# Altium PCB ALU_Add_Shift.PcbDoc
Units mil, origin at the board's own origin, x right, y up, seen from the top; angles counter-clockwise.
Board outline 5200 x 2700 mil, 2 copper layers (Top Layer, Bottom Layer), stack 61.756 mil thick; 43 components, 102 nets, 335 pads, 125 vias.
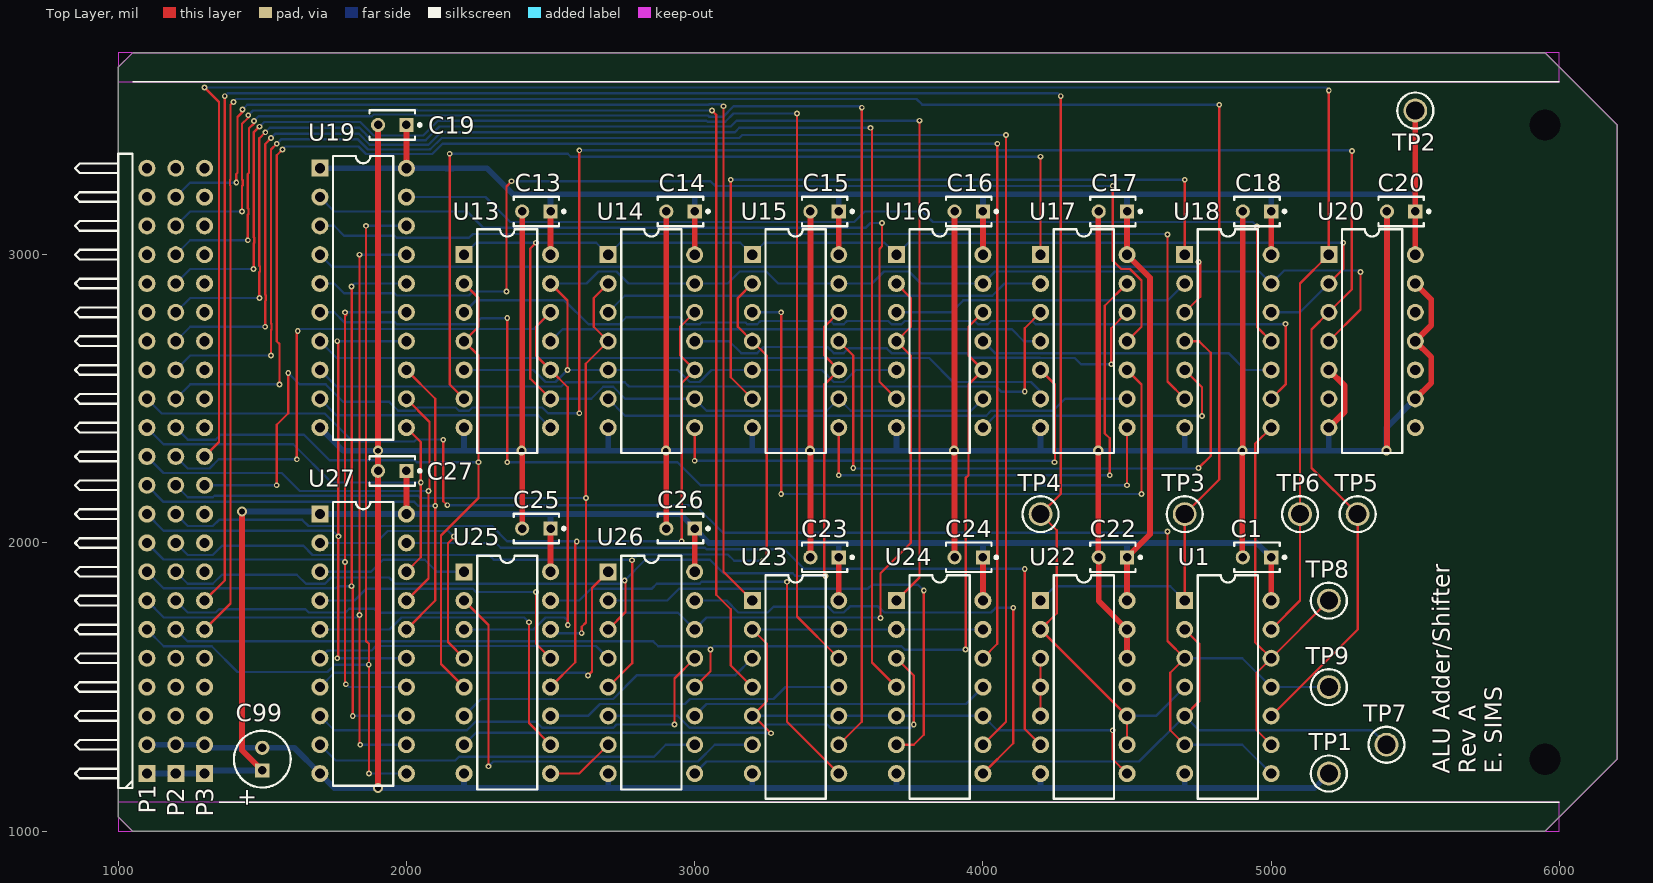
[diagram p0: Top Layer view]
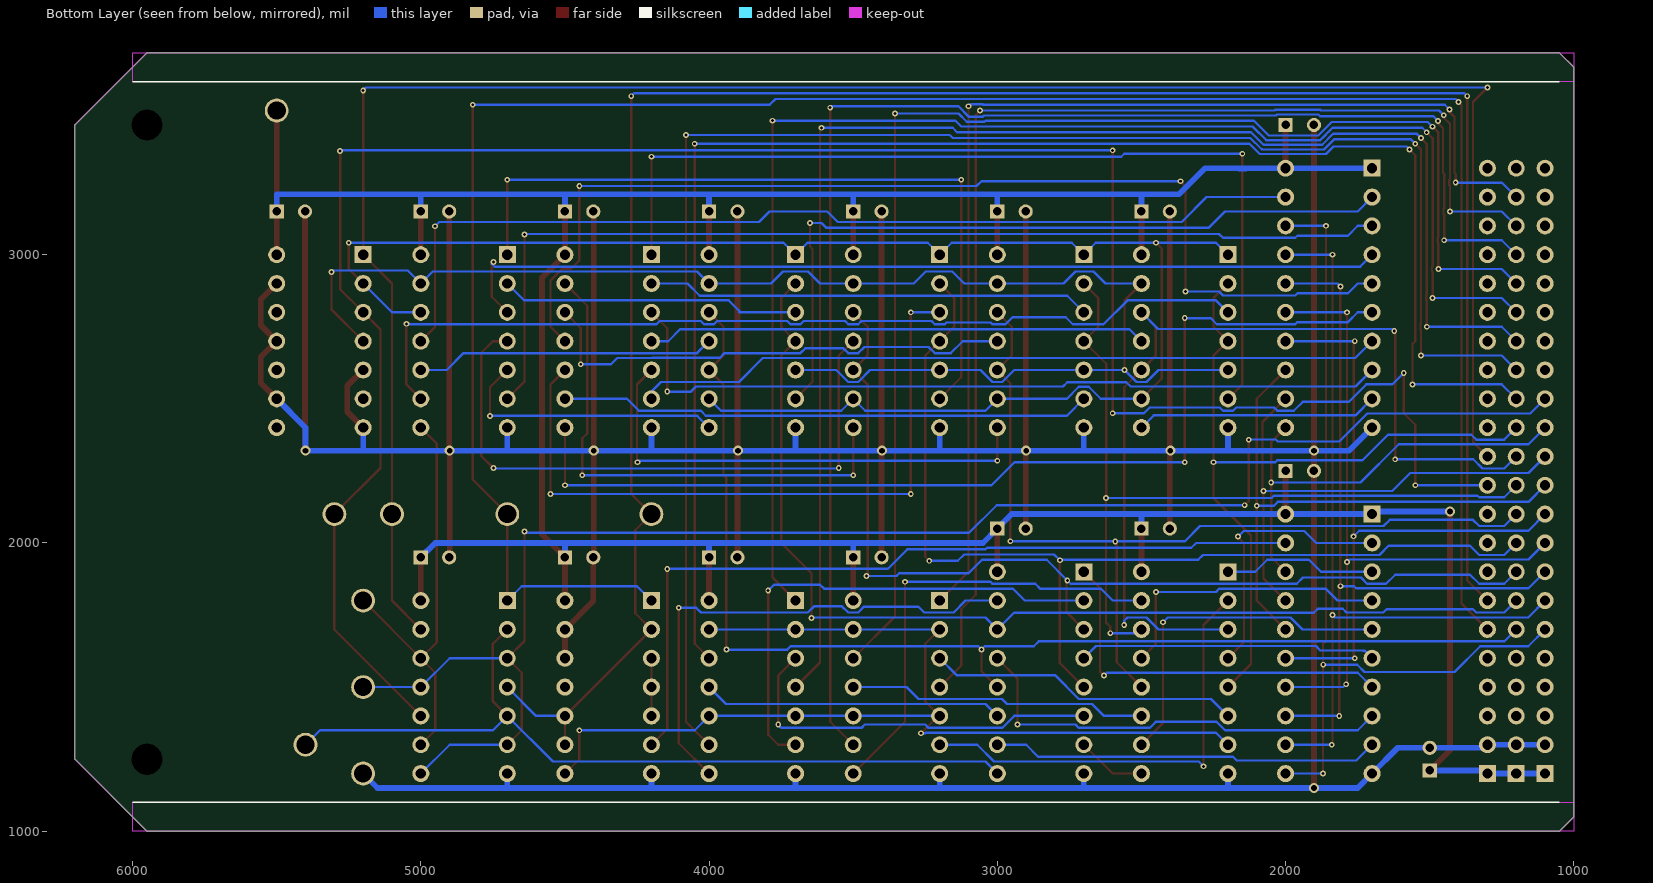
[diagram p1: Bottom Layer view, seen from below]

## Layer stack, top to bottom
Top Solder: solder mask 1, SM-001, Dk 4
Top Layer: signal copper 1.378
Dielectric 1: core 59, Core-043, Dk 4.3
Bottom Layer: signal copper 1.378
Bottom Solder: solder mask 1, SM-001, Dk 4

## Board outline
1000,1050 1050,1000 5950,1000 6200,1250 6200,3450 5950,3700 1050,3700 1000,3650

## Design rules (kind name [scope] priority, off if disabled: settings)
Clearance [All] p1: gap=8 ignorepadtopadclearanceinfootprint=FALSE
HoleSize [All] p1: absolutevalues=TRUE maxlimit=120 minlimit=10 maxpercent=80.000 minpercent=20.000
PolygonConnect [All] p1: connectstyle=Relief reliefconductorwidth=10 reliefentries=4 polygonreliefangle="90 Angle" airgapwidth=10
RoutingVias "Schematic Routing Via Style_1" [InNetClass('PWR')] p1: holewidth=20 width=35 viastyle="Through Hole" minholewidth=20 minwidth=35 maxholewidth=20 maxwidth=50
RoutingVias [All] p2: holewidth=28 width=50 viastyle="Through Hole" minholewidth=10 minwidth=20 maxholewidth=28 maxwidth=50
SilkToSilkClearance [All] p1: silktosilkclearance=5
SolderMaskExpansion [All] p1: expansion=4 istentingtop=FALSE
Width "Schematic Width Constraint_1" [InNetClass('PWR')] p1: maxlimit=50 minlimit=20 preferedwidth=20
Width [All] p2: maxlimit=20 minlimit=8 preferedwidth=8
28 further rules are at their usual default settings.

## Classes and differential pairs
net class PWR: GND VCC
net class Yd[0..7]: Yd0 Yd1 Yd2 Yd3 Yd4 Yd5 Yd6 Yd7
net class ADD[0..7]: ADD0 ADD1 ADD2 ADD3 ADD4 ADD5 ADD6 ADD7
net class SH[0..7]: SH0 SH1 SH2 SH3 SH4 SH5 SH6 SH7
component class SHIFT: C13 C14 C15 C16 C17 C18 C19 C20 U13 U14 U15 U16 U17 U18 U19 U20
component class ADD: C22 C23 C24 C25 C26 C27 U22 U23 U24 U25 U26 U27
net class Y[0..7]: Y0 Y1 Y2 Y3 Y4 Y5 Y6 Y7
net class X[0..7]: X0 X1 X2 X3 X4 X5 X6 X7
component class ALU_Add_Shift: C1 C99 P1 P2 P3 TP1 TP2 TP3 TP4 TP5 TP6 TP7 TP8 TP9 U1
net class BUS[0..7]: BUS0 BUS1 BUS2 BUS3 BUS4 BUS5 BUS6 BUS7

## Components (designator, comment, footprint, x,y, rotation, side; value= is the part's Value field where it differs from the comment)
C1 "K104K15X7RF5TL2" VISH-K104K15X7RF5TL2 4950.79,1950 r180 top locked
C13 "K104K15X7RF5TL2" VISH-K104K15X7RF5TL2 2450.79,3150 r180 top locked
C14 "K104K15X7RF5TL2" VISH-K104K15X7RF5TL2 2950.79,3150 r180 top locked
C15 "K104K15X7RF5TL2" VISH-K104K15X7RF5TL2 3450.79,3150 r180 top locked
C16 "K104K15X7RF5TL2" VISH-K104K15X7RF5TL2 3950.79,3150 r180 top locked
C17 "K104K15X7RF5TL2" VISH-K104K15X7RF5TL2 4450.79,3150 r180 top locked
C18 "K104K15X7RF5TL2" VISH-K104K15X7RF5TL2 4950.79,3150 r180 top locked
C19 "K104K15X7RF5TL2" VISH-K104K15X7RF5TL2 1950.79,3450 r180 top locked
C20 "K104K15X7RF5TL2" VISH-K104K15X7RF5TL2 5450.79,3150 r180 top locked
C22 "K104K15X7RF5TL2" VISH-K104K15X7RF5TL2 4450.79,1950 r180 top locked
C23 "K104K15X7RF5TL2" VISH-K104K15X7RF5TL2 3450.79,1950 r180 top locked
C24 "K104K15X7RF5TL2" VISH-K104K15X7RF5TL2 3950.79,1950 r180 top locked
C25 "K104K15X7RF5TL2" VISH-K104K15X7RF5TL2 2450.79,2050 r180 top locked
C26 "K104K15X7RF5TL2" VISH-K104K15X7RF5TL2 2950.79,2050 r180 top locked
C27 "K104K15X7RF5TL2" VISH-K104K15X7RF5TL2 1950.79,2250 r180 top locked
C99 "Cap Pol5" C5x7 1500,1250 r90 top locked value=10uF
P1 "Header 22H" HDR1X22H 1100,1200 r90 top locked
P2 "Header 22H" HDR1X22H 1200,1200 r90 top locked
P3 "Header 22H" HDR1X22H 1300,1200 r90 top locked
TP1 "GND" KSTN-5011_V 5200,1200 r0 top locked
TP2 "VCC" KSTN-5011_V 5500,3500 r0 top locked
TP3 "ADD#" KSTN-5011_V 4700,2100 r0 top locked
TP4 "SUB#" KSTN-5011_V 4200,2100 r0 top locked
TP5 "LEFT#" KSTN-5011_V 5300,2100 r0 top locked
TP6 "RIGHT#" KSTN-5011_V 5100,2100 r0 top locked
TP7 "CO_ADD" KSTN-5011_V 5400,1300 r0 top locked
TP8 "CO_SHIFT" KSTN-5011_V 5200,1800 r0 top locked
TP9 "CO_IMM" KSTN-5011_V 5200,1500 r0 top locked
U1 "SN74LS125AN" N014 4850,1500 r270 top locked
U13 "SN74LS08N" N014 2350,2700 r270 top locked
U14 "SN74LS08N" N014 2850,2700 r270 top locked
U15 "SN74LS08N" N014 3350,2700 r270 top locked
U16 "SN74LS08N" N014 3850,2700 r270 top locked
U17 "SN74LS32N" N014 4350,2700 r270 top locked
U18 "SN74LS32N" N014 4850,2700 r270 top locked
U19 "SN74LS245N" N020 1850,2850 r270 top locked
U20 "SN74LS04N" N014 5350,2700 r270 top locked
U22 "SN74LS32AN" N014 4350,1500 r270 top locked
U23 "SN74LS86AN" N014 3350,1500 r270 top locked
U24 "SN74LS86AN" N014 3850,1500 r270 top locked
U25 "SN74LS283D" J016D 2350,1550 r270 top locked
U26 "SN74LS283D" J016D 2850,1550 r270 top locked
U27 "SN74LS245N" N020 1850,1650 r270 top locked

## Footprints (in the part's own frame and the unit in brackets; to place one, negate y for a bottom-side part, rotate by r counter-clockwise, add the part's x,y. Pads: shape width x height; smd on the part's side, far side on the other; paste and mask are expansions set on the pad)
C5x7 [mm] "Capacitor; 2 Leads"
  rect 1.25x1.25 hole 0.75: 1(-1,0)
  round 1.25 hole 0.75: 2(1,0)
  silkscreen extent -2.5,-2.5 2.5,2.5, body extent -2.5,-2.5 2.5,2.5, height 7
HDR1X22H [mm] "Connector; Header; 22 Position; Right Angle"
  rect 1.5x1.5 hole 0.9: 1(0,0)
  round 1.5 hole 0.9: 2(2.54,0) 3(5.08,0) 4(7.62,0) 5(10.16,0) 6(12.7,0) 7(15.24,0) 8(17.78,0) 9(20.32,0) 10(22.86,0) 11(25.4,0) 12(27.94,0) 13(30.48,0) 14(33.02,0) 15(35.56,0) 16(38.1,0) 17(40.64,0) 18(43.18,0) 19(45.72,0) 20(48.26,0) 21(50.8,0) 22(53.34,0)
  silkscreen extent -1.27,1.27 54.61,6.35
J016D [mm] "DIP; 16 Leads; Row Spacing 7.62 mm; Pitch 2.54 mm"
  rect 1.5x1.5 hole 0.9: 1(-8.89,-3.81)
  round 1.5 hole 0.9: 2(-6.35,-3.81) 3(-3.81,-3.81) 4(-1.27,-3.81) 5(1.27,-3.81) 6(3.81,-3.81) 7(6.35,-3.81) 8(8.89,-3.81) 9(8.89,3.81) 10(6.35,3.81) 11(3.81,3.81) 12(1.27,3.81) 13(-1.27,3.81) 14(-3.81,3.81) 15(-6.35,3.81) 16(-8.89,3.81)
  silkscreen extent -10.3,-2.65 10.3,2.65, body extent -10.46,-5.08 10.46,5.12, height 7.88
KSTN-5011_V [mm] "Test Point, Dia 3.17mm"
  round 2.1 hole 1.6: 1(0,0)
  silkscreen extent -1.59,-1.58 1.59,1.58, body extent -1.59,-1.59 1.59,1.59, height 8.13
N014 [mm] "DIP; 14 Leads; Row Spacing 7.62 mm; Pitch 2.54 mm"
  rect 1.5x1.5 hole 0.9: 1(-7.62,-3.81)
  round 1.5 hole 0.9: 2(-5.08,-3.81) 3(-2.54,-3.81) 4(0,-3.81) 5(2.54,-3.81) 6(5.08,-3.81) 7(7.62,-3.81) 8(7.62,3.81) 9(5.08,3.81) 10(2.54,3.81) 11(0,3.81) 12(-2.54,3.81) 13(-5.08,3.81) 14(-7.62,3.81)
  silkscreen extent -9.85,-2.65 9.85,2.65, body extent -9.59,-3.3 9.59,3.3, height 5.08
N020 [mm] "DIP; 20 Leads; Row Spacing 7.62 mm; Pitch 2.54 mm"
  rect 1.5x1.5 hole 0.9: 1(-11.43,-3.81)
  round 1.5 hole 0.9: 2(-8.89,-3.81) 3(-6.35,-3.81) 4(-3.81,-3.81) 5(-1.27,-3.81) 6(1.27,-3.81) 7(3.81,-3.81) 8(6.35,-3.81) 9(8.89,-3.81) 10(11.43,-3.81) 11(11.43,3.81) 12(8.89,3.81) 13(6.35,3.81) 14(3.81,3.81) 15(1.27,3.81) 16(-1.27,3.81) 17(-3.81,3.81) 18(-6.35,3.81) 19(-8.89,3.81) 20(-11.43,3.81)
  silkscreen extent -12.5,-2.65 12.5,2.65, body extent -13.08,-5.08 13.08,5.12, height 7.88
VISH-K104K15X7RF5TL2 [mm] "THD, 2-Leads, Body 4x2.6mm"
  rect 1.25x1.25 hole 0.75: 1(-1.25,0)
  round 1.25 hole 0.75: 2(1.25,0)
  silkscreen extent -2.55,-1.3 2,1.3, body extent -2,-1.3 2,1.3, height 5.6

## Part data
C1 C13 C14 C15 C16 C17 C18 C19 C20 C22 C23 C24 C25 C26 C27: library part CMP-2000-06508-1, "Ceramic Capacitor, 100 nF, +/- 10%, 50 V, -55 to 125 degC, 2-Pin THD, RoHS, Tape and Reel", Capacitance=0.1µF, Manufacturer=Vishay, Operating Temperature=-55°C~125°C, Package / Case=Radial, Package Description="2-Pin Through Hole Device, Body 4 x 2.6 mm", Ratings=-, Standard Package=1, Temperature Coefficient=X7R, Tolerance=±10%, Voltage - Rated=50V, Applications=GeneralPurpose, Catalog Drawings=Mono-KapSide2-15_5.58Mono-KapSide1_15, Category=Capacitors, Datasheet URL=http://www.vishay.com/docs/45171/kseries.pdf, Datasheet Version=08/2013, Family=CeramicCapacitors, Features=-, Height - Seated (Max)="0.220\"(5.58mm)", Lead Spacing="0.098\"(2.50mm)", Lead Style=Straight, Manufacturer URL=http://www.vishay.com/, Mounting Technology=ThroughHole, Mounting Type=ThroughHole, Online Catalog=Mono-Kap™Series, Other Names=BC1084CT, Package Reference=K104K15X7RF5TL2, Packaging=CutTape(CT), Series=Mono-Kap™K, Size / Dimension="0.157\"Lx0.098\"W(4.00mmx2.50mm)", Thickness (Max)=-
C99: "Polarized Capacitor", LatestRevisionDate=17-Jul-2002, LatestRevisionNote="Re-released for DXP Platform.", PackageDescription="Polarized Capacitor; 2 Leads", PackageReference=POLAR0.8, Published=8-Jun-2000, Publisher="Altium Limited"
P1 P2 P3: "Header, 22-Pin, Right Angle", LatestRevisionDate=17-Jul-2002, LatestRevisionNote="Re-released for DXP Platform.", Publisher="Altium Limited", System=Connector
TP1 TP2 TP3 TP4 TP5 TP6 TP7 TP8 TP9: library part TP
U1: "Quadruple Bus Buffer with 3-State Outputs", ComponentLink1Description="Manufacturer Link", ComponentLink1URL=http://www.ti.com/, ComponentLink2Description=Datasheet, ComponentLink2URL=http://www-s.ti.com/sc/ds/sn74ls126a.pdf, DatasheetVersion=Mar-1988, LatestRevisionDate=06-Jun-2005, LatestRevisionNote="Stylized 3D Model Added.", PackageDescription="DIP; 14 Leads; Row Spacing 7.62 mm; Pitch 2.54 mm", PackageReference=N014, PackageVersion=Oct-1995, Published=8-Jun-2000, Publisher="Altium Limited"
U13 U14 U15 U16: "Quadruple 2-Input Positive-AND Gate", ComponentLink1Description="Manufacturer Link", ComponentLink1URL=http://www.ti.com/, ComponentLink2Description=Datasheet, ComponentLink2URL=http://www-s.ti.com/sc/ds/SN74LS08.pdf, DatasheetVersion=Mar-1988, LatestRevisionDate=04-Mar-2005, LatestRevisionNote="Stylized 3D Model Added.", PackageDescription="DIP; 14 Leads; Row Spacing 7.62 mm; Pitch 2.54 mm", PackageReference=N014, PackageVersion=Oct-1995, Published=8-Jun-2000, Publisher="Altium Limited"
U17 U18: "Quadruple 2-Input Positive-OR Gate", ComponentLink1Description="Manufacturer Link", ComponentLink1URL=http://www.ti.com/, ComponentLink2Description=Datasheet, ComponentLink2URL=http://www-s.ti.com/sc/ds/sn74ls32.pdf, DatasheetVersion=Mar-1988, LatestRevisionDate=04-Mar-2005, LatestRevisionNote="Stylized 3D Model Added.", PackageDescription="DIP; 14 Leads; Row Spacing 7.62 mm; Pitch 2.54 mm", PackageReference=N014, PackageVersion=Oct-1995, Published=8-Jun-2000, Publisher="Altium Limited"
U19 U27: "Octal Bus Transceiver with 3-State Outputs", ComponentLink1Description="Manufacturer Link", ComponentLink1URL=http://www.ti.com/, ComponentLink2Description=Datasheet, ComponentLink2URL=http://www-s.ti.com/sc/ds/sn74ls245.pdf, DatasheetVersion=Mar-1988, LatestRevisionDate=04-Mar-2005, LatestRevisionNote="Stylized 3D Model Added.", PackageDescription="DIP; 20 Leads; Row Spacing 7.62 mm; Pitch 2.54 mm", PackageReference=N020, PackageVersion=Oct-1995, Published=8-Jun-2000, Publisher="Altium Limited"
U20: "Hex Inverter", ComponentLink1Description="Manufacturer Link", ComponentLink1URL=http://www.ti.com/, ComponentLink2Description=Datasheet, ComponentLink2URL=http://www-s.ti.com/sc/ds/sn74ls04.pdf, DatasheetVersion=Mar-1988, LatestRevisionDate=04-Mar-2005, LatestRevisionNote="Stylized 3D Model Added.", PackageDescription="DIP; 14 Leads; Row Spacing 7.62 mm; Pitch 2.54 mm", PackageReference=N014, PackageVersion=Oct-1995, Published=8-Jun-2000, Publisher="Altium Limited"
U22: library part SN74LS00N, "Quadruple 2-Input Positive-NAND Gate", ComponentLink1Description="Manufacturer Link", ComponentLink1URL=http://www.ti.com/, ComponentLink2Description=Datasheet, ComponentLink2URL=http://www-s.ti.com/sc/ds/sn74ls00.pdf, DatasheetVersion=Mar-1988, LatestRevisionDate=04-Mar-2005, LatestRevisionNote="Stylized 3D Model Added.", PackageDescription="DIP; 14 Leads; Row Spacing 7.62 mm; Pitch 2.54 mm", PackageReference=N014, PackageVersion=Oct-1995, Published=8-Jun-2000, Publisher="Altium Limited"
U23 U24: "Quadruple 2-Input Exclusive-OR Gate", ComponentLink1Description="Manufacturer Link", ComponentLink1URL=http://www.ti.com/, ComponentLink2Description=Datasheet, ComponentLink2URL=http://www-s.ti.com/sc/ds/sn74ls86a.pdf, DatasheetVersion=Mar-1988, LatestRevisionDate=04-Mar-2005, LatestRevisionNote="Stylized 3D Model Added.", PackageDescription="DIP; 14 Leads; Row Spacing 7.62 mm; Pitch 2.54 mm", PackageReference=N014, PackageVersion=Oct-1995, Published=8-Jun-2000, Publisher="Altium Limited"
U25 U26: "4-Bit Binary Full Adder with Fast Carry", ComponentLink1Description="Manufacturer Link", ComponentLink1URL=http://www.ti.com, ComponentLink2Description=Datasheet, ComponentLink2URL=http://www-s.ti.com/sc/ds/sn54ls283.pdf, DatasheetVersion=Mar-1988, LatestRevisionDate=04-Mar-2005, LatestRevisionNote="Stylized 3D Model Added.", PackageDescription="DIP; 16 Leads; Row Spacing 7.62 mm; Pitch 2.54 mm", PackageReference=J016D, PackageVersion=Jun-1999, Published=8-Jun-2000, Publisher="Altium Limited"

## Free pads (board coordinates)
  round 0 hole 109: ""(5950,1250) ""(5950,3450)

## Via types
v1: diameter 20, hole 10, Top Layer to Bottom Layer, tented both sides, 113 vias
v2: diameter 35, hole 20, Top Layer to Bottom Layer, tented both sides, 10 vias
v3: diameter 20, hole 10, Top Layer to Bottom Layer, 2 vias

## Nets (pads, with @x,y where several pads share a name; then routed paths per layer and width w, separated by ;. In a path a pad name is that pad's centre, name@x,y a point inside that pad or via, vN(x,y) a via of type N, cw(c..) or ccw(c..) an arc to the next point about the centre after c; other vN are vias at no path point)
ADD0: U25.4 U27.2 | length 944.2
  Top Layer w8: v1(2165,2022) 2165,2020 2144,1999 2144,1656 U25.4
  Bottom Layer w8: U27.2 1893.47,2000 1935,2041.53 2145.47,2041.53 v1(2165,2022)
ADD1: U25.1 U27.3 | length 534.4
  Bottom Layer w8: U27.3 1877,1900 1897,1920 1918.53,1941.53 2063.47,1941.53 2105,1900 U25.1
ADD2: U25.13 U27.4 | length 1022.7
  Top Layer w8: v1(2450,1830) 2450,1650 U25.13
  Bottom Layer w8: U27.4 1820,1800 1861.53,1841.53 2230,1841.53 2241.53,1830 v1(2450,1830)
ADD3: U25.10 U27.5 | length 1205.1
  Top Layer w8: v1(2425,1725) 2425,1375 U25.10
  Bottom Layer w8: U27.5 1941.27,1700 1982.8,1741.53 2408.47,1741.53 v1(2425,1725)
ADD4: U26.4 U27.6 | length 1035.2
  Bottom Layer w8: U27.6 1726.47,1626.47 1730.46,1626.47 1730.98,1627 1879.53,1627 1895,1642.47 2037.53,1642.47 2476.17,1642.47 2523.83,1642.47 2657.53,1642.47 U26.4
ADD5: U26.1 U27.7 | length 1343.8
  Top Layer w8: v1(2630,1540) 2644,1554 2644,1694.37 2644,1844 U26.1
  Bottom Layer w8: U27.7 1750,1550 1858.89,1550 1881.11,1550 2620,1550 v1(2630,1540)
ADD6: U26.13 U27.8 | length 1535.8
  Top Layer w8: v1(2930,1370) 2930,1530 U26.13
  Bottom Layer w8: U27.8 1750,1350 2210.14,1350 2240.14,1380 2450,1380 2471.53,1358.47 2517.2,1358.47 2682.8,1358.47 2717.2,1358.47 2728.73,1370 v1(2930,1370)
ADD7: U26.10 U27.9 | length 1345.6
  Bottom Layer w8: U27.9 1755,1245 2169.33,1245 2182.8,1258.47 2858.47,1258.47 2900,1300 U26.10
ADD#: P3.6 TP3.1 U1.1 U22.1 | length 7616.6
  Top Layer w8: P3.6 1390,1790 1390,3238.89 1388,3240.89 1388,3259.11 1390,3261.11 1390,3520 v1(1400,3530) ; U1.1 TP3.1 4820,2220 v1(4820,3520)
  Bottom Layer w8: v1(1400,3530) 1410,3540 3770,3540 3790,3520 v1(4820,3520) ; U22.1 4250,1850 4650,1850 U1.1
ALU_RFU16: P1.16
ALU_RFU17: P1.17
ALU_RFU18: P1.18
ALU_RFU19: P1.19
ALU_RFU20: P1.20
ALU_RFU21: P1.21
ALU_RFU22: P1.22
ALU_RFU44: P2.22
ALU_RFU65: P3.21
ALU_RFU66: P3.22
BUS0: P1.13 U19.11 U27.18 | length 1570.1
  Top Layer w8: U27.18 2050,1950 v1(2050,2210) 2050,2350 U19.11
  Bottom Layer w8: P1.13 1157.53,2342.47 1276.17,2342.47 1323.83,2342.47 1607.53,2342.47 1740,2210 v1(2050,2210)
BUS1: P1.12 U19.12 U27.17 | length 1794.7
  Top Layer w8: U27.17 2077,1877 v1(2077,2180) 2080,2180 2080,2420 U19.12
  Bottom Layer w8: P1.12 1157.53,2242.47 1276.17,2242.47 1323.83,2242.47 1567.53,2242.47 1630,2180 v1(2077,2180)
BUS2: P1.11 U19.13 U27.16 | length 2012.3
  Top Layer w8: U27.16 2100,1800 v1(2100,2129) 2100,2500 U19.13
  Bottom Layer w8: P1.11 1157.53,2142.47 2027,2142.47 2040.47,2129 v1(2100,2129)
BUS3: P1.10 U19.14 U27.15 | length 2279.2
  Top Layer w8: v1(1760,1600) 1764,1604 v1(1764,2023) 1764,2696 v1(1760,2700)
  Bottom Layer w8: P1.10 1157.53,2042.47 1744.53,2042.47 v1(1764,2023) ; v1(1760,1600) U27.15 ; v1(1760,2700) U19.14
BUS4: P1.9 U19.15 U27.14 | length 2439.8
  Top Layer w8: v1(1787,2800) 1792,2800 1792,2792 1787,2787 v1(1787,1934) 1787,1513 v1(1790,1510)
  Bottom Layer w8: P1.9 1157.53,1942.47 1778.53,1942.47 v1(1787,1934) ; v1(1787,2800) U19.15 ; v1(1790,1510) 1800,1500 U27.14
BUS5: P1.8 U19.16 U27.13 | length 2608.7
  Top Layer w8: v1(1810,2890) v1(1810,1850) 1814,1846 v1(1814,1400)
  Bottom Layer w8: P1.8 1157.53,1842.47 1755,1842.47 1762.53,1850 v1(1810,1850) ; v1(1810,2890) 1820,2900 U19.16 ; v1(1814,1400) U27.13
BUS6: P1.7 U19.17 U27.12 | length 2790.2
  Top Layer w8: v1(1837,3000) 1838.5,2998.5 1837,2997 v1(1837,1750) 1837,1303 v1(1840,1300)
  Bottom Layer w8: P1.7 1158.47,1741.53 1828.53,1741.53 v1(1837,1750) ; v1(1837,3000) U19.17 ; v1(1840,1300) U27.12
BUS7: P1.6 U19.18 U27.11 | length 3016
  Top Layer w8: v1(1860,3100) 1860,1660 1870,1650 1870,1578.15 v1(1869.57,1577.72) 1870,1577.29 v1(1870,1200)
  Bottom Layer w8: P1.6 1158.47,1641.53 1324.47,1641.53 1414,1552 1726,1552 1751.72,1577.72 v1(1869.57,1577.72) ; v1(1860,3100) U19.18 ; v1(1870,1200) U27.11
CLK: P1.3
CO_ADD: TP7.1 U1.2 U1.5 U26.9 | length 2865.7
  Top Layer w8: U1.5 4750,1450 4750,1650 U1.2
  Bottom Layer w8: U26.9 3041.53,1241.53 4541.53,1241.53 U1.5 4750,1350 5350,1350 TP7.1
CO_IMM: P1.14 TP9.1 U1.3 U1.6 U1.8 U1.11 | length 5556.4
  Top Layer w8: v1(2128,2358) 2128,2145 v1(2142,2131) ; v1(4640,2040) 4640,1660 U1.3 4650,1550 4650,1350 U1.6
  Bottom Layer w8: P1.14 1151,2449 1717,2449 1814,2352 2027,2352 2034,2359 2129,2359 v1(2128,2358) ; v1(2142,2131) 3002,2131 3098,2035 4635,2035 v1(4640,2040) ; U1.6 4900,1300 U1.8 ; U1.3 4900,1600 U1.11 TP9.1
CO_SHIFT: TP8.1 U1.9 U1.12 U18.8 | length 1469.8
  Top Layer w8: U1.9 4950,1350 4950,1550 U1.12 ; U18.8 4945,2345 4945,1655 U1.12 ; TP8.1 U1.12
F4_IMM: P1.15
GND: C1.2 C13.2 C14.2 C15.2 C16.2 C17.2 C18.2 C19.2 C20.2 C22.2 C23.2 C24.2 C25.2 C26.2 C27.2 C99.2 P1.2 P2.2 P3.2 TP1.1 U1.7 U13.7 U14.7 U15.7 U16.7 U17.7 U18.7 U19.10 U20.5 U20.7 U20.9 U20.11 U20.13 U22.7 U22.12 U22.13 U23.7 U24.7 U25.8 U26.8 U27.10 | length 20264
  Top Layer w20: v2(1901.57,1150) C27.2 v2(1901.57,2320) C19.2 ; v2(2400,2320) v2@2401.57,2320 ; C25.2 v2@2401.57,2320 ; C13.2 v2@2401.57,2320 ; v2(2900,2320) v2@2901.57,2320 ; C26.2 v2@2901.57,2320 ; C14.2 v2@2901.57,2320 ; v2(3400,2320) v2@3401.57,2320 ; C23.2 v2@3401.57,2320 ; C15.2 v2@3401.57,2320 ; v2(3900,2320) v2@3901.57,2320 ; C24.2 v2@3901.57,2320 ; C16.2 v2@3901.57,2320 ; C22.2@4400,1951.57 v2(4400,2320) 4400,3150 C17.2 ; C22.2 4401.57,1798.43 U22.13 U22.12 ; C1.2 4900,1951.57 v2(4900,2320) 4901.57,2320 C18.2 ; U20.7 5255,2455 5255,2545 U20.5 ; v2(5400,2320) 5401.57,2321.57 C20.2 ; U20.9 5555,2555 5555,2645 U20.11 5555,2755 5555,2845 U20.13
  Bottom Layer w20: P1.2 P2.2 P3.2 1310.63,1289.37 C99.2 1610.63,1289.37 U27.10 1750,1150 v2(1901.57,1150) 2200,1150 ; U19.10 1780,2320 v2(1901.57,2320) 2200,2320 ; U25.8 2200,1150 ; U13.7 2200,2320 ; U26.8 2700,1150 ; U14.7 2700,2320 ; U23.7 3200,1150 ; U15.7 3200,2320 ; U24.7 3700,1150 ; U16.7 3700,2320 ; U22.7 4200,1150 ; U17.7 4200,2320 ; U1.7 4700,1150 ; U18.7 4700,2320 ; TP1.1 5150,1150 4700,1150 ; U20.7 5200,2320 ; U20.9 5400,2400 v2(5400,2320) 5200,2320 ; 2200,1150 2700,1150 ; 2200,2320 v2(2400,2320) 2700,2320 ; 2700,1150 3200,1150 ; 2700,2320 v2(2900,2320) 3200,2320 ; 3200,1150 3700,1150 ; 3200,2320 v2(3400,2320) 3700,2320 ; 3700,1150 4200,1150 ; 3700,2320 v2(3900,2320) 4200,2320 ; 4200,1150 4700,1150 ; 4200,2320 v2(4400,2320) 4700,2320 ; 4700,2320 v2(4900,2320) 5200,2320
LEFT: U13.5 U13.13 U14.5 U14.13 U15.5 U15.13 U16.5 U16.13 U18.13 U20.4 | length 5181.4
  Top Layer w8: U13.13 2558.73,2841.27 v1(2558.73,2600) ; U20.4 5310,2810 v1(5310,2940)
  Bottom Layer w8: U13.5 2441.27,2600 2482.8,2558.47 2517.2,2558.47 v1(2558.73,2600) U14.5 2941.27,2600 2982.8,2558.47 3017.2,2558.47 3058.73,2600 U15.5 3441.27,2600 3482.8,2558.47 3517.2,2558.47 3558.73,2600 U16.5 ; U13.13 2625,2900 2666.53,2941.53 2728.47,2941.53 2770,2900 U14.13 3115,2900 3156.53,2941.53 3248.47,2941.53 3290,2900 U15.13 3615,2900 3656.53,2941.53 3743.47,2941.53 3785,2900 U16.13 4041.53,2941.53 4958.47,2941.53 U18.13 5045,2945 5305,2945 v1(5310,2940)
LEFT#: P3.11 TP5.1 U1.10 U20.3 | length 7545
  Top Layer w8: v3(1550,2200) 1550,2410 1590,2450 v3(1590,2590) ; v1(2600,2450) v1(2600,3362) ; U1.10 5300,1700 TP5.1 5140,2260 5140,2740 U20.3 5280,2880 v1(5280,3360)
  Bottom Layer w8: P3.11 v3(1550,2200) ; v3(1590,2590) 1630,2550 1720,2550 1780,2490 1940,2490 1971.53,2458.47 2028.47,2458.47 2040,2470 2171.27,2470 2182.8,2458.47 2217.2,2458.47 2228.73,2470 2471.27,2470 2491.27,2450 v1(2600,2450) ; v1(2600,3362) 5278,3362 v1(5280,3360)
M\2: P3.7 TP4.1 U1.4 U22.2 U22.9 U22.10 | length 7378.4
  Top Layer w8: P3.7 1370,1870 v1(1370,3550) ; v1(4270,3550) 4270,2170 TP4.1 4256,2044 4256,1756 U22.2 U22.10 U22.9
  Bottom Layer w8: v1(1370,3550) 1380,3560 4260,3560 v1(4270,3550) ; U22.10 4600,1400 U1.4
M\3: P3.8
M\4: P3.9
M\5: P3.10
M\7: P3.12 TP6.1 U1.13 U20.1 | length 7178.4
  Top Layer w8: P3.12 1350,2350 1350,3530 v1(1300,3580) ; U1.13 5100,1800 TP6.1 5100,2900 U20.1 v1(5200,3570)
  Bottom Layer w8: v1(1300,3580) 4256.89,3580 4283.11,3580 5190,3580 v1(5200,3570)
M\8: P3.13
M\9: P3.14
M\10: P3.15
M\11: P3.16
M\12: P3.17
M\13: P3.18
M\14: P3.19
M\15: P3.20
NetU13_6: U13.6 U17.1 | length 3264.9
  Top Layer w8: v1(2150,3350) 2150,2550 U13.6 ; U17.1 v1(4200,3340)
  Bottom Layer w8: v1(2150,3350) 2560,3350 2570,3340 v1(4200,3340)
NetU13_11: U13.11 U17.4 | length 1734.4
  Bottom Layer w8: U13.11 2541.53,2741.53 3717.2,2741.53 3982.8,2741.53 4100.47,2741.53 4142,2700 U17.4
NetU14_3: U14.3 U17.2 | length 1541.4
  Bottom Layer w8: U14.3 2757.53,2857.53 4032.53,2857.53 4075,2900 U17.2
NetU14_6: U14.6 U17.9 | length 1848.4
  Bottom Layer w8: U14.6 2758.47,2441.53 4011.53,2441.53 4028.47,2458.47 4243.47,2458.47 4285,2500 U17.9
NetU14_8: U14.8 U17.5 | length 1709.8
  Top Layer w8: v1(3000,2285) U14.8 ; U17.5 4250,2550 4250,2280 v1(4248,2280)
  Bottom Layer w8: v1(3000,2285) 4245,2285 4249,2281 v1(4248,2280)
NetU14_11: U14.11 U17.12 | length 1712.4
  Top Layer w8: v1(4445,2620) 4445,2745 U17.12
  Bottom Layer w8: U14.11 3120,2700 3161.53,2658.47 3217.2,2658.47 3238.73,2680 3461.27,2680 3482.8,2658.47 3517.2,2658.47 3533.73,2675 3666.27,2675 3682.8,2658.47 3946.53,2658.47 3962.53,2642.47 4197.53,2642.47 4198.47,2641.53 4318.47,2641.53 4340,2620 v1(4445,2620)
NetU15_3: U15.3 U17.10 | length 2430.7
  Top Layer w8: v1(3300,2170) v1(3300,2800) ; U17.10 4550,2550 v1(4550,2170)
  Bottom Layer w8: U15.3 v1(3300,2800) ; v1(3300,2170) v1(4550,2170)
NetU15_6: U15.6 U18.1 | length 2626.1
  Top Layer w8: v1(3125,3260) 3125,2575 U15.6 ; U18.1 v1(4700,3260)
  Bottom Layer w8: v1(3125,3260) v1(4700,3260)
NetU15_8: U15.8 U17.13 | length 1808.9
  Top Layer w8: v1(3500,2235) U15.8 ; v1(4440,2235) 4440,2363 4423,2380 4423,2823 U17.13
  Bottom Layer w8: v1(3500,2235) v1(4440,2235)
NetU15_11: U15.11 U18.4 | length 2185.5
  Top Layer w8: U15.11 3550,2650 v1(3550,2260) ; U18.4 4750,2700 4790,2660 4790,2302 v1(4748,2260)
  Bottom Layer w8: v1(3550,2260) 3552,2258 4748,2258 v1(4748,2260)
NetU16_3: U16.3 U18.2 | length 1039.4
  Bottom Layer w8: U16.3 3895,2800 ; 3895,2805 3931.53,2841.53 4017.2,2841.53 4182.8,2841.53 4641.53,2841.53 U18.2
NetU16_8: U16.8 U18.5 | length 962.7
  Top Layer w8: U18.5 4760,2540 v1(4760,2440)
  Bottom Layer w8: U16.8 4041.53,2441.53 4758.47,2441.53 v1(4760,2440)
NetU22_3: U22.3 U22.4 U22.5 | length 200
  Top Layer w8: U22.5 U22.4 U22.3
NetU25_9: U25.9 U26.7 | length 241.4
  Top Layer w8: U25.9 2600,1200 U26.7
OUT#: U22.6 U27.19 | length 2815.1
  Top Layer w8: v1(4145,1910) 4145,1355 U22.6
  Bottom Layer w8: U27.19 2310,2000 2327,1983 3035.89,1983 3040.89,1978 3312,1978 3380,1910 v1(4145,1910)
RIGHT: U13.1 U13.9 U14.1 U14.9 U15.1 U15.9 U16.1 U16.9 U18.12 U20.2 | length 5756.1
  Top Layer w8: v1(2450,3041.53) 2430,3021.53 2430,2570 U13.9 ; U20.2 5250,2950 v1(5250,3041.53)
  Bottom Layer w8: U13.1 2241.53,3041.53 v1(2450,3041.53) 2658.47,3041.53 U14.1 2741.53,3041.53 3158.47,3041.53 U15.1 3241.53,3041.53 3658.47,3041.53 U16.1 3741.53,3041.53 v1(5250,3041.53) ; U13.9 2641.27,2500 2682.8,2541.53 2717.2,2541.53 2758.73,2500 U14.9 3041.53,2458.47 3458.47,2458.47 U15.9 3541.53,2458.47 3958.47,2458.47 U16.9 ; U18.12 5100,2800 U20.2
RST#: P1.4
SH0: U13.8 U19.9 | length 841.4
  Bottom Layer w8: U19.9 1757.53,2442.47 2457.53,2442.47 U13.8
SH1: U17.3 U19.8 | length 2786.3
  Top Layer w8: v1(4145,2525) 4145,2745 U17.3
  Bottom Layer w8: U19.8 1757.53,2542.47 2537.47,2542.47 2552.53,2557.53 2757.47,2557.53 2772.53,2542.47 4045,2542.47 4062.47,2525 v1(4145,2525)
SH2: U17.6 U19.7 | length 2597.5
  Bottom Layer w8: U19.7 1758.47,2641.53 3813.47,2641.53 3896.53,2558.47 4166.53,2558.47 4200,2525 U17.6
SH3: U17.8 U19.6 | length 3559.3
  Top Layer w8: v1(2350,2280) v1(2350,2780) ; v1(4500,2200) U17.8
  Bottom Layer w8: U19.6 1750,2800 1784,2766 1959,2766 1966.53,2758.47 2238.47,2758.47 2260,2780 v1(2350,2780) ; v1(2350,2280) 2940,2280 3020,2200 v1(4500,2200)
SH4: U17.11 U19.5 | length 3769.8
  Top Layer w8: v1(2347,2872) 2347,3237 v1(2364.8,3254.8) ; v1(4450,3238) 4450,3230 4450.79,3229.21 4450.79,2979.21 4480,2950 4510,2950 4550,2910 4550,2750 U17.11
  Bottom Layer w8: U19.5 1750,2900 1784,2866 1959,2866 1966.53,2858.47 2217.2,2858.47 2230.73,2872 v1(2347,2872) ; v1(2364.8,3254.8) 3055.2,3254.8 3072,3238 v1(4450,3238)
SH5: U18.3 U19.4 | length 3287.4
  Top Layer w8: U18.3 4754,2854 4754,2975 v1(4748,2975)
  Bottom Layer w8: U19.4 1741.53,2958.47 4743.47,2958.47 4754,2969 v1(4748,2975)
SH6: U18.6 U19.3 | length 3558.5
  Top Layer w8: v1(4640,3070) 4640,2560 U18.6
  Bottom Layer w8: U19.3 1750,3100 1784,3066 1959,3066 1966.53,3058.47 2217.2,3058.47 2230.73,3072 4638,3072 v1(4640,3070)
SH7: U16.6 U19.2 | length 2639.5
  Top Layer w8: v1(3650,3110) 3650,3029 3641,3020 3641,2559 U16.6
  Bottom Layer w8: U19.2 1750,3150 2210,3150 2267,3093 3593,3093 3610,3110 v1(3650,3110)
SHIFT_OUT#: U18.11 U19.19 | length 3442.2
  Top Layer w8: v1(4950.79,3098.82) 4950.79,2749.21 U18.11
  Bottom Layer w8: U19.19 2274,3200 2360.61,3113.39 3553.39,3113.39 3590,3150 3790,3150 3826.61,3113.39 4936.21,3113.39 v1(4950.79,3098.82)
SUB: U22.8 U23.2 U23.5 U23.10 U23.13 U24.2 U24.5 U24.10 U24.13 U25.7 | length 3755.5
  Top Layer w8: U23.2 3250,1650 3250,1450 U23.5 3205,1400 v1(3265,1340) ; v1(4450,1350) 4450,1250 U22.8
  Bottom Layer w8: U25.7 2241.53,1341.53 3248.47,1341.53 3250,1340 v1(3265,1340) ; U23.5 U23.10 U24.5 U24.10 4050,1350 v1(4450,1350) ; U23.2 U23.13 U24.2 U24.13
VCC: C1.1 C13.1 C14.1 C15.1 C16.1 C17.1 C18.1 C19.1 C20.1 C22.1 C23.1 C24.1 C25.1 C26.1 C27.1 C99.1 P1.1 P2.1 P3.1 TP2.1 U1.14 U13.14 U14.14 U15.14 U16.14 U17.14 U18.14 U19.1 U19.20 U20.14 U22.14 U23.14 U24.14 U25.16 U26.16 U27.1 U27.20 | length 13142.7
  Top Layer w20: v2(1430,2109.5) 1430,2100 1430,1280.63 C99.1 ; U27.20 C27.1 ; U19.20 C19.1 ; U25.16 C25.1 ; U13.14 C13.1 ; U26.16 C26.1 ; U14.14 C14.1 ; U23.14 C23.1 ; U15.14 C15.1 ; U24.14 C24.1 ; U16.14 C16.1 ; U22.14 C22.1 4580,2030 4580,2920 U17.14 C17.1 ; U1.14 C1.1 ; U18.14 C18.1 ; U20.14 C20.1 TP2.1
  Bottom Layer w20: P1.1 P2.1 P3.1 1310.63,1210.63 C99.1 ; v2(1430,2109.5) 1690.5,2109.5 U27.1 U27.20 2500,2100 ; U19.1 U19.20 2137.4,3300 2138.4,3299 2161.6,3299 2162.6,3300 2280,3300 2370,3210 2500,3210 ; C25.1 2500,2100 ; C13.1 2500,3210 ; C14.1 3000,3210 ; C23.1 3500,2000 ; C15.1 3500,3210 ; C24.1 4000,2000 ; C16.1 4000,3210 ; C22.1 4500,2000 ; C17.1 4500,3210 ; C1.1 4950,2000 4500,2000 ; C18.1 5000,3210 ; C20.1 5500,3210 5000,3210 ; 2500,2100 2950,2100 C26.1 3050,2000 3500,2000 ; 2500,3210 3000,3210 ; 3000,3210 3500,3210 ; 3500,2000 4000,2000 ; 3500,3210 4000,3210 ; 4000,2000 4500,2000 ; 4000,3210 4500,3210 ; 4500,3210 5000,3210
X0: P2.13 U13.2 U13.4 U25.5 | length 2663
  Top Layer w8: U25.5 2120,1580 2120,2026 2250,2156 v1(2250,2280) 2250,2650 U13.4 2250,2750 2250,2850 U13.2
  Bottom Layer w8: P2.13 1241.53,2358.47 1338.47,2358.47 1355.64,2375.64 1644.36,2375.64 1733.39,2286.61 2029.58,2286.61 2036.18,2280 v1(2250,2280)
X0_RS: U13.3 U18.9 | length 3246.7
  Top Layer w8: U18.9 5050,2550 v1(5050,2760)
  Bottom Layer w8: U13.3 2241.53,2841.53 2548.47,2841.53 2631.53,2758.47 2738.47,2758.47 2762.8,2782.8 2947.2,2782.8 2971.53,2758.47 3017.2,2758.47 3023.73,2765 3176.27,2765 3182.8,2758.47 3217.2,2758.47 3228.73,2770 3471.27,2770 3482.8,2758.47 3517.2,2758.47 3528.73,2770 3671.27,2770 3682.8,2758.47 3717.2,2758.47 3728.73,2770 3971.27,2770 3982.8,2758.47 4017.2,2758.47 4028.73,2770 4171.27,2770 4182.8,2758.47 4217.2,2758.47 4482.8,2758.47 4517.2,2758.47 4682.8,2758.47 4717.2,2758.47 4966.53,2758.47 5017.2,2758.47 5048.47,2758.47 v1(5050,2760)
X1: P2.12 U13.10 U13.12 U25.3 | length 3348.7
  Top Layer w8: v1(1620,2290) 1620,2732 v1(1623,2735) ; U13.12 2450,2750 2450,2650 U13.10 2560,2540 v1(2560,1715)
  Bottom Layer w8: P2.12 1241.53,2258.47 1317.2,2258.47 1348.73,2290 v1(1620,2290) ; v1(1623,2735) 1630.47,2742.47 2023.83,2742.47 2176.17,2742.47 2223.83,2742.47 2442.47,2742.47 U13.12 ; U25.3 2441.27,1700 2482.8,1741.53 2517.2,1741.53 2548.47,1741.53 2560,1730 v1(2560,1715)
X2: P2.11 U14.2 U14.4 U25.14 | length 2852.5
  Top Layer w8: v1(2608,1687) 2608,1709 2623,1724 v1(2623,2156) 2622,2157 2622,2622 U14.4 2650,2750 2650,2850 U14.2
  Bottom Layer w8: P2.11 1241.53,2158.47 1328.47,2158.47 1334,2164 1623.37,2164 2041,2164 2049,2156 v1(2623,2156) ; U25.14 2513,1687 v1(2608,1687)
X3: P2.10 U14.10 U14.12 U25.12 | length 3208.5
  Top Layer w8: U25.12 2586,1586 2586,2000 v1(2591,2005) ; v1(2955,2006) 2955,2555 U14.10 2950,2650 2950,2750 U14.12
  Bottom Layer w8: P2.10 1241.53,2058.47 1328.47,2058.47 1350,2080 1639,2080 1660.53,2058.47 2296.53,2058.47 2349,2006 v1(2955,2006)
X4: P2.9 U15.2 U15.4 U26.5 | length 3609.6
  Top Layer w8: U26.5 2783,1583 v1(2783,1940) ; U15.2 3150,2850 3150,2750 U15.4 3250,2650 3250,1952 v1(3236,1938)
  Bottom Layer w8: P2.9 1241.53,1958.47 1328.47,1958.47 1360,1990 1643,1990 1674.53,1958.47 2286.53,1958.47 2303.47,1941.53 v1@2784.53,1941.53 ; v1(2783,1940) v1@2784.53,1941.53 ; v1(3236,1938) 3137,1938 3115,1960 2803,1960 v1@2784.53,1941.53
X5: P2.8 U15.10 U15.12 U26.3 | length 3548.2
  Top Layer w8: U26.3 2760,1760 2760,1867.2 v1(2757.2,1870) ; v1(3454.33,1885) 3450,1889.33 3450,2550 U15.10 3450,2650 3450,2750 U15.12
  Bottom Layer w8: P2.8 1241.53,1858.47 1328.47,1858.47 1360,1890 1620,1890 1651.53,1858.47 1717.2,1858.47 1738.73,1880 1940,1880 1961.53,1858.47 2745.67,1858.47 v1(2757.2,1870) 2828.72,1941.53 3053.47,1941.53 3100,1895 3340,1895 3350,1885 v1(3454.33,1885)
X6: P2.7 U16.2 U16.4 U26.14 | length 3790.6
  Top Layer w8: v1(3645,1740) 3645,1895 3750,2000 3750,2650 U16.4 3750,2750 3750,2850 U16.2
  Bottom Layer w8: P2.7 1241.53,1758.47 1338.47,1758.47 1350,1770 1650,1770 1661.53,1758.47 1788.47,1758.47 1802,1772 1888,1772 1902.47,1757.53 2942.47,1757.53 U26.14 3041.53,1741.53 3643.47,1741.53 v1(3645,1740)
X7: P2.6 U16.10 U16.12 U26.12 | length 4167.6
  Top Layer w8: U26.12 3055,1555 v1(3055,1630) ; v1(3940,1630) 3940,2225 3950,2235 3950,2550 U16.10 3950,2650 3950,2750 U16.12
  Bottom Layer w8: P2.6 1241.53,1658.47 1338.47,1658.47 2856.53,1658.47 2873.47,1641.53 3043.47,1641.53 v1(3055,1630) 3066.53,1641.53 3717.2,1641.53 3728.73,1630 v1(3940,1630)
X7_LS: U16.11 U18.10 | length 1041.4
  Bottom Layer w8: U16.11 4041.53,2658.47 4182.8,2658.47 4851.53,2658.47 4910,2600 U18.10
Y0: P2.21 U23.1 | length 3928.7
  Top Layer w8: v1(1410,3250) 1410,3280 1414,3284 1414,3477.7 1431.41,3495.11 v1(1431.41,3503.59) ; v1(3100,3515) 3100,1900 U23.1
  Bottom Layer w8: P2.21 1250,3250 v1(1410,3250) ; v1(1431.41,3503.59) 1447.81,3520 3048.89,3520 3050.89,3522 3069.11,3522 3093,3522 v1(3100,3515)
Y1: P2.20 U23.4 | length 4270.6
  Top Layer w8: v1(1430,3150) 1430,3238.89 1432,3240.89 1432,3259.11 1430,3261.11 1430,3454.1 1451.21,3475.31 v1(1451.21,3483.79) ; v1(3060,3500) 3075,3485 3075,1820 3125,1770 3125,1575 U23.4
  Bottom Layer w8: P2.20 1250,3150 v1(1430,3150) ; v1(1451.21,3483.79) 1467.41,3500 1877.18,3500 1879.78,3502.61 2036.2,3502.61 2038.81,3500 v1(3060,3500)
Y2: P2.19 U23.9 | length 5077.5
  Top Layer w8: v1(1450,3050) 1450,3138.89 1452,3140.89 1452,3159.11 1450,3161.11 1450,3280 1454,3284 1454,3438.5 1471.01,3455.51 v1(1471.01,3463.99) ; U23.9 3580,1380 3580,2180 v1(3580,3510)
  Bottom Layer w8: P2.19 1250,3050 v1(1450,3050) ; v1(1471.01,3463.99) 1487.01,3480 1879.81,3480 1886.41,3486.61 2029.58,3486.61 2033.09,3483.09 3045.8,3483.09 3050.89,3478 3098,3478 3135,3515 3575,3515 v1(3580,3510)
Y3: P2.18 U23.12 | length 4670.4
  Top Layer w8: v1(1470,2950) 1470,3038.89 1472,3040.89 1472,3059.11 1470,3061.11 1470,3423.39 v1(1490.8,3444.2) ; v1(3355,3490) 3355,1745 U23.12
  Bottom Layer w8: P2.18 1250,2950 v1(1470,2950) ; v1(1490.8,3444.2) 1506.61,3460 1840,3460 1864.97,3435.03 1864.97,3434.84 1884.9,3414.9 1886.41,3413.39 2058.39,3413.39 2110,3465 3041.26,3465 3045.26,3461 3106,3461 3135,3490 v1(3355,3490)
Y4: P2.17 U24.1 | length 4915.1
  Top Layer w8: v1(1490,2850) 1490,2938.89 1492,2940.89 1492,2959.11 1490,2961.11 1490,3403.79 v1(1510.6,3424.4) ; U24.1 3780,1880 v1(3780,3465)
  Bottom Layer w8: P2.17 1250,2850 v1(1490,2850) ; v1(1510.6,3424.4) 1526.21,3440 1837.37,3440 1848.97,3428.4 1848.97,3428.21 1868.9,3408.28 1879.78,3397.39 1893.04,3397.39 2067.39,3397.39 2115,3445 3125,3445 3145,3465 v1(3780,3465)
Y5: P2.16 U24.4 | length 5098.9
  Top Layer w8: v1(1510,2750) 1510,2838.89 1512,2840.89 1512,2859.11 1510,2861.11 1510,3384.2 v1(1530.4,3404.6) ; v1(3610,3440) 3615,3435 3615,2015 3615,1585 U24.4
  Bottom Layer w8: P2.16 1250,2750 v1(1510,2750) ; v1(1530.4,3404.6) 1545.8,3420 1834.55,3420 1873.16,3381.39 2076.39,3381.39 2120,3425 3140,3425 3155,3440 v1(3610,3440)
Y6: P2.15 U24.9 | length 5815
  Top Layer w8: v1(1530,2650) 1530,2738.89 1532,2740.89 1532,2759.11 1530,2761.11 1530,3364.6 v1(1550.2,3384.8) ; U24.9 4080,1380 v1(4080,3415)
  Bottom Layer w8: P2.15 1250,2650 v1(1530,2650) ; v1(1550.2,3384.8) 1565.4,3400 1831.92,3400 1866.92,3365 2080,3365 2080.39,3365.39 2083.02,3365.39 2122.63,3405 3155,3405 3165,3415 v1(4080,3415)
Y7: P2.14 U24.12 | length 5523.7
  Top Layer w8: v1(1560,2550) 1560,2690 1550,2700 1550,3345 v1(1570,3365) ; U24.12 4050,1650 v1(4050,3385)
  Bottom Layer w8: P2.14 1250,2550 v1(1560,2550) ; v1(1570,3365) 1580,3375 1834.3,3375 1860.3,3349 2089,3349 2089.39,3349.39 2089.65,3349.39 2125.25,3385 v1(4050,3385)
Yd0: U23.3 U25.6 | length 1082.8
  Bottom Layer w8: U25.6 2258.47,1458.47 2717.2,1458.47 2800.26,1541.53 3141.53,1541.53 U23.3
Yd1: U23.6 U25.2 | length 1556.3
  Top Layer w8: U25.2 2285,1715 v1(2285,1225)
  Bottom Layer w8: v1(2285,1225) 2301.53,1241.53 3011.53,1241.53 3070,1300 U23.6
Yd2: U23.8 U25.15 | length 1586.5
  Top Layer w8: v1(3320,1865) 3320,1380 U23.8
  Bottom Layer w8: U25.15 2600,1800 2641.53,1841.53 2851.53,1841.53 2868.47,1858.47 3017.2,1858.47 3023.73,1865 v1(3320,1865)
Yd3: U23.11 U25.11 | length 1041.4
  Bottom Layer w8: U25.11 2630,1400 2671.53,1441.53 2966.53,1441.53 2983.47,1458.47 3273.47,1458.47 3315,1500 U23.11
Yd4: U24.3 U26.6 | length 1346.4
  Top Layer w8: U24.3 3760,1540 v1(3760,1370)
  Bottom Layer w8: U26.6 2941.27,1400 2982.8,1358.47 3238.47,1358.47 3250,1370 3460,1370 3471.53,1358.47 3517.2,1358.47 3671.53,1358.47 3717.2,1358.47 3748.47,1358.47 v1(3760,1370)
Yd5: U24.6 U26.2 | length 1735.6
  Top Layer w8: U24.6 3760,1300 3795,1335 v1(3795,1835)
  Bottom Layer w8: U26.2 2905,1800 2946.53,1841.53 3537.36,1841.53 3601.53,1841.53 3615,1855 3775,1855 v1(3795,1835)
Yd6: U24.8 U26.15 | length 1782.5
  Top Layer w8: U24.8 4105,1305 v1(4105,1775)
  Bottom Layer w8: U26.15 3110,1800 3151.53,1758.47 3253.47,1758.47 3274.12,1779.12 3462.15,1779.12 3482.8,1758.47 3517.2,1758.47 3538.73,1780 3636.11,1780 3657.64,1758.47 4028.47,1758.47 4045,1775 v1(4105,1775)
Yd7: U24.11 U26.11 | length 1041.4
  Bottom Layer w8: U26.11 3041.53,1441.53 3941.53,1441.53 U24.11
pads on no net: P1.5 P2.3 P2.4 P2.5 P3.3 P3.4 P3.5 U20.6 U20.8 U20.10 U20.12 U22.11

## Keep-outs
Top Layer:
  rectangle: 1000,3600 6000,3700
  rectangle: 1000,1000 6000,1100
Bottom Layer:
  rectangle: 1000,1000 6000,1100
  rectangle: 1000,3600 6000,3700
Keep-Out Layer:
  the board outline again, w1

## Silkscreen, mask and mechanical layers (free items; w line width, h text height)
Top Overlay:
  lines w5: 1050,3600 6000,3600 ; 1350,1100 6000,1100
  text "ALU Adder/Shifter / Rev A / E. SIMS" at 5800,1200 h60 r90
Bottom Overlay:
  lines w5: 1050,1100 6000,1100 ; 1050,3600 6000,3600

## Text inside footprints (layer, text, board x,y; h text height)
C99: Top Overlay "+" at 1421.38,1150.95 h59.06 r270